# Altium PCB keyInput.PcbDoc
Units mm, origin at the board's own origin, x right, y up, seen from the top; angles counter-clockwise.
Board outline 85 x 80 mm, 2 copper layers (Top Layer, Bottom Layer); 26 components, 32 nets, 92 pads, 0 vias.
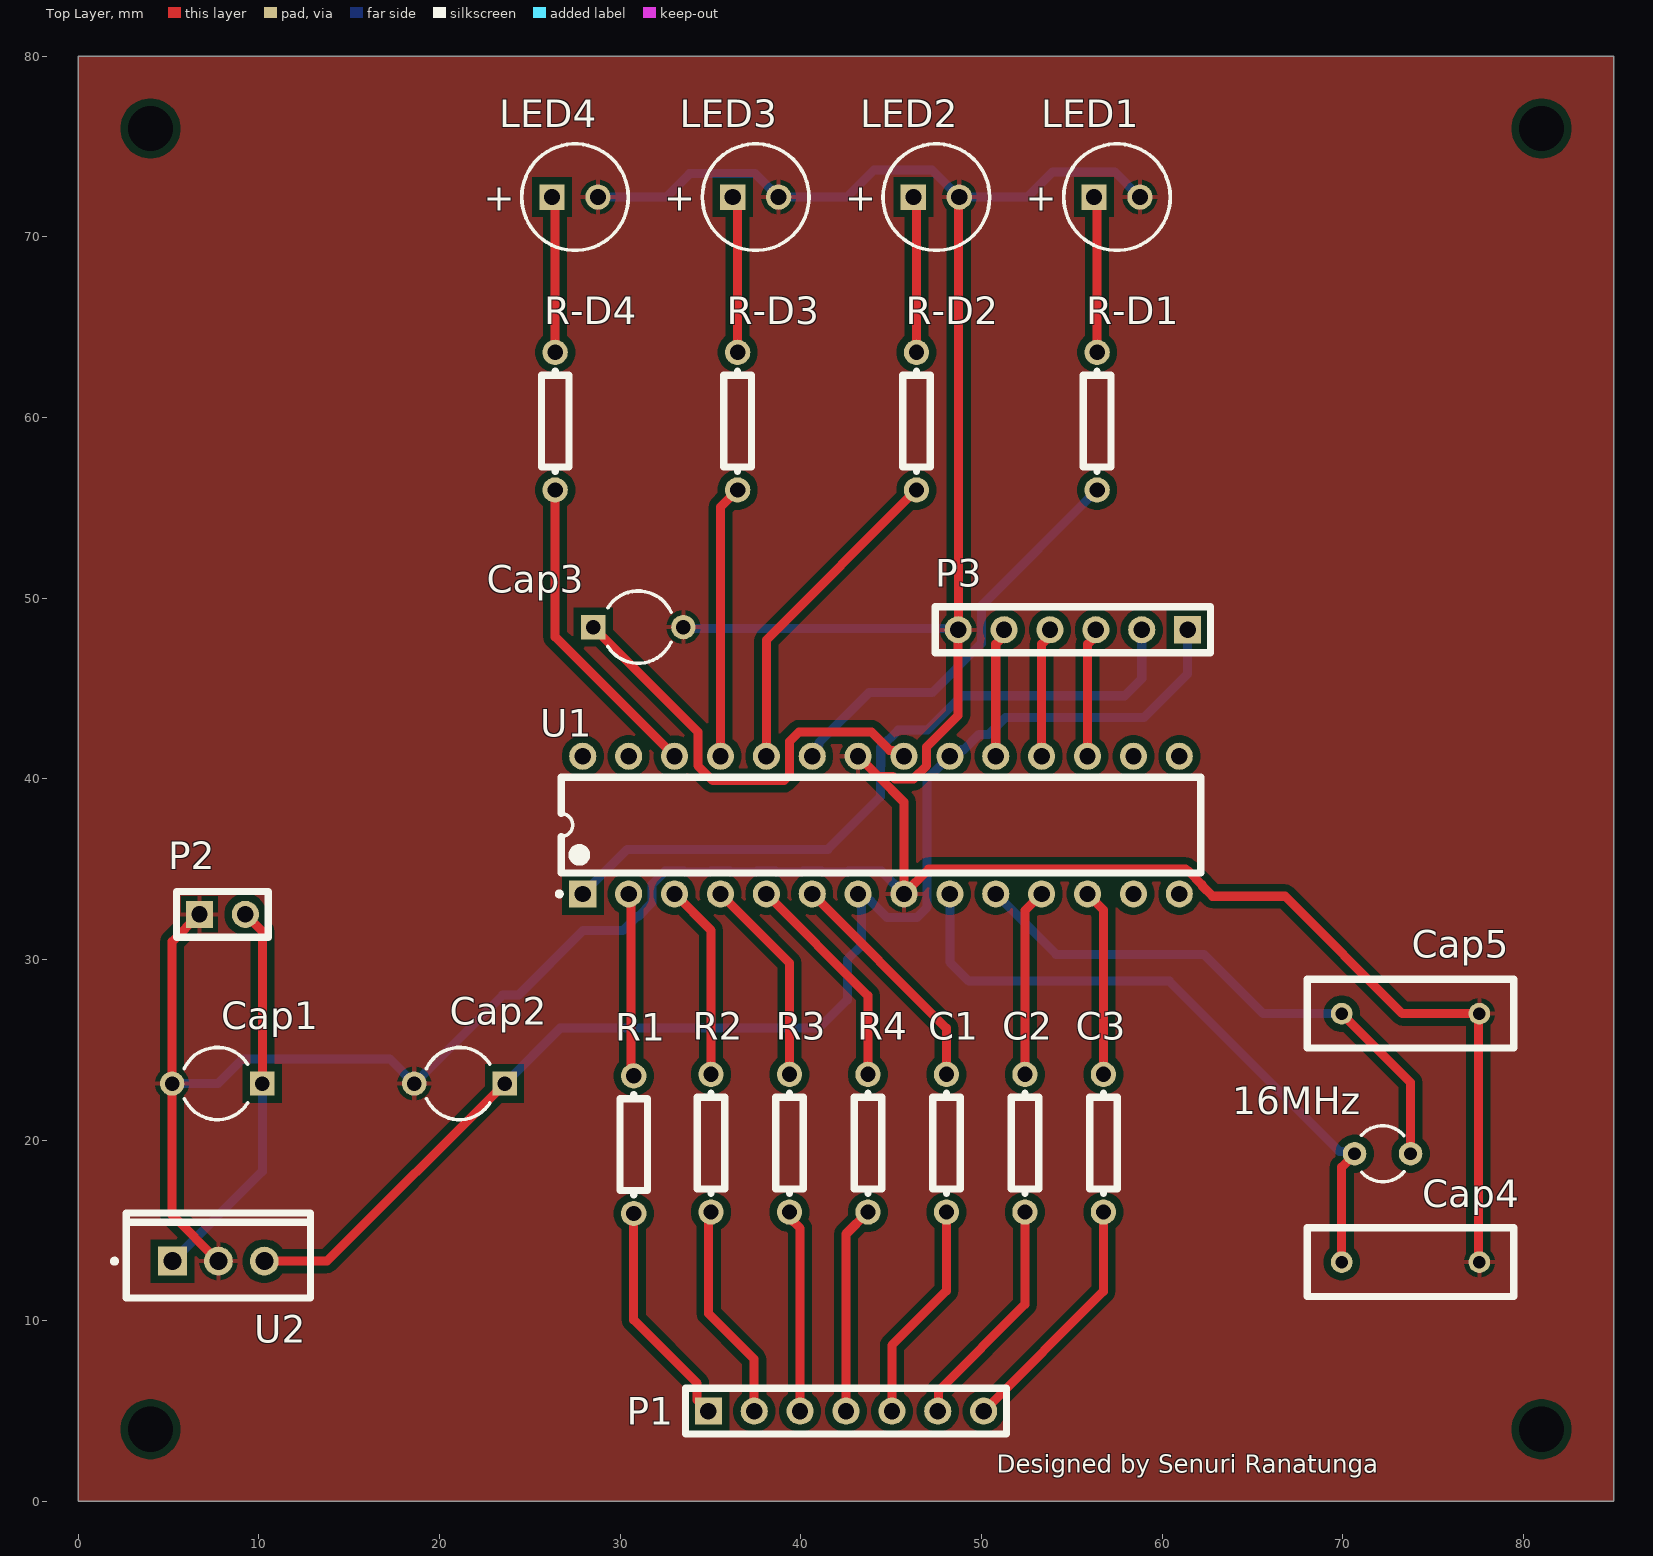
[diagram p0: Top Layer view]
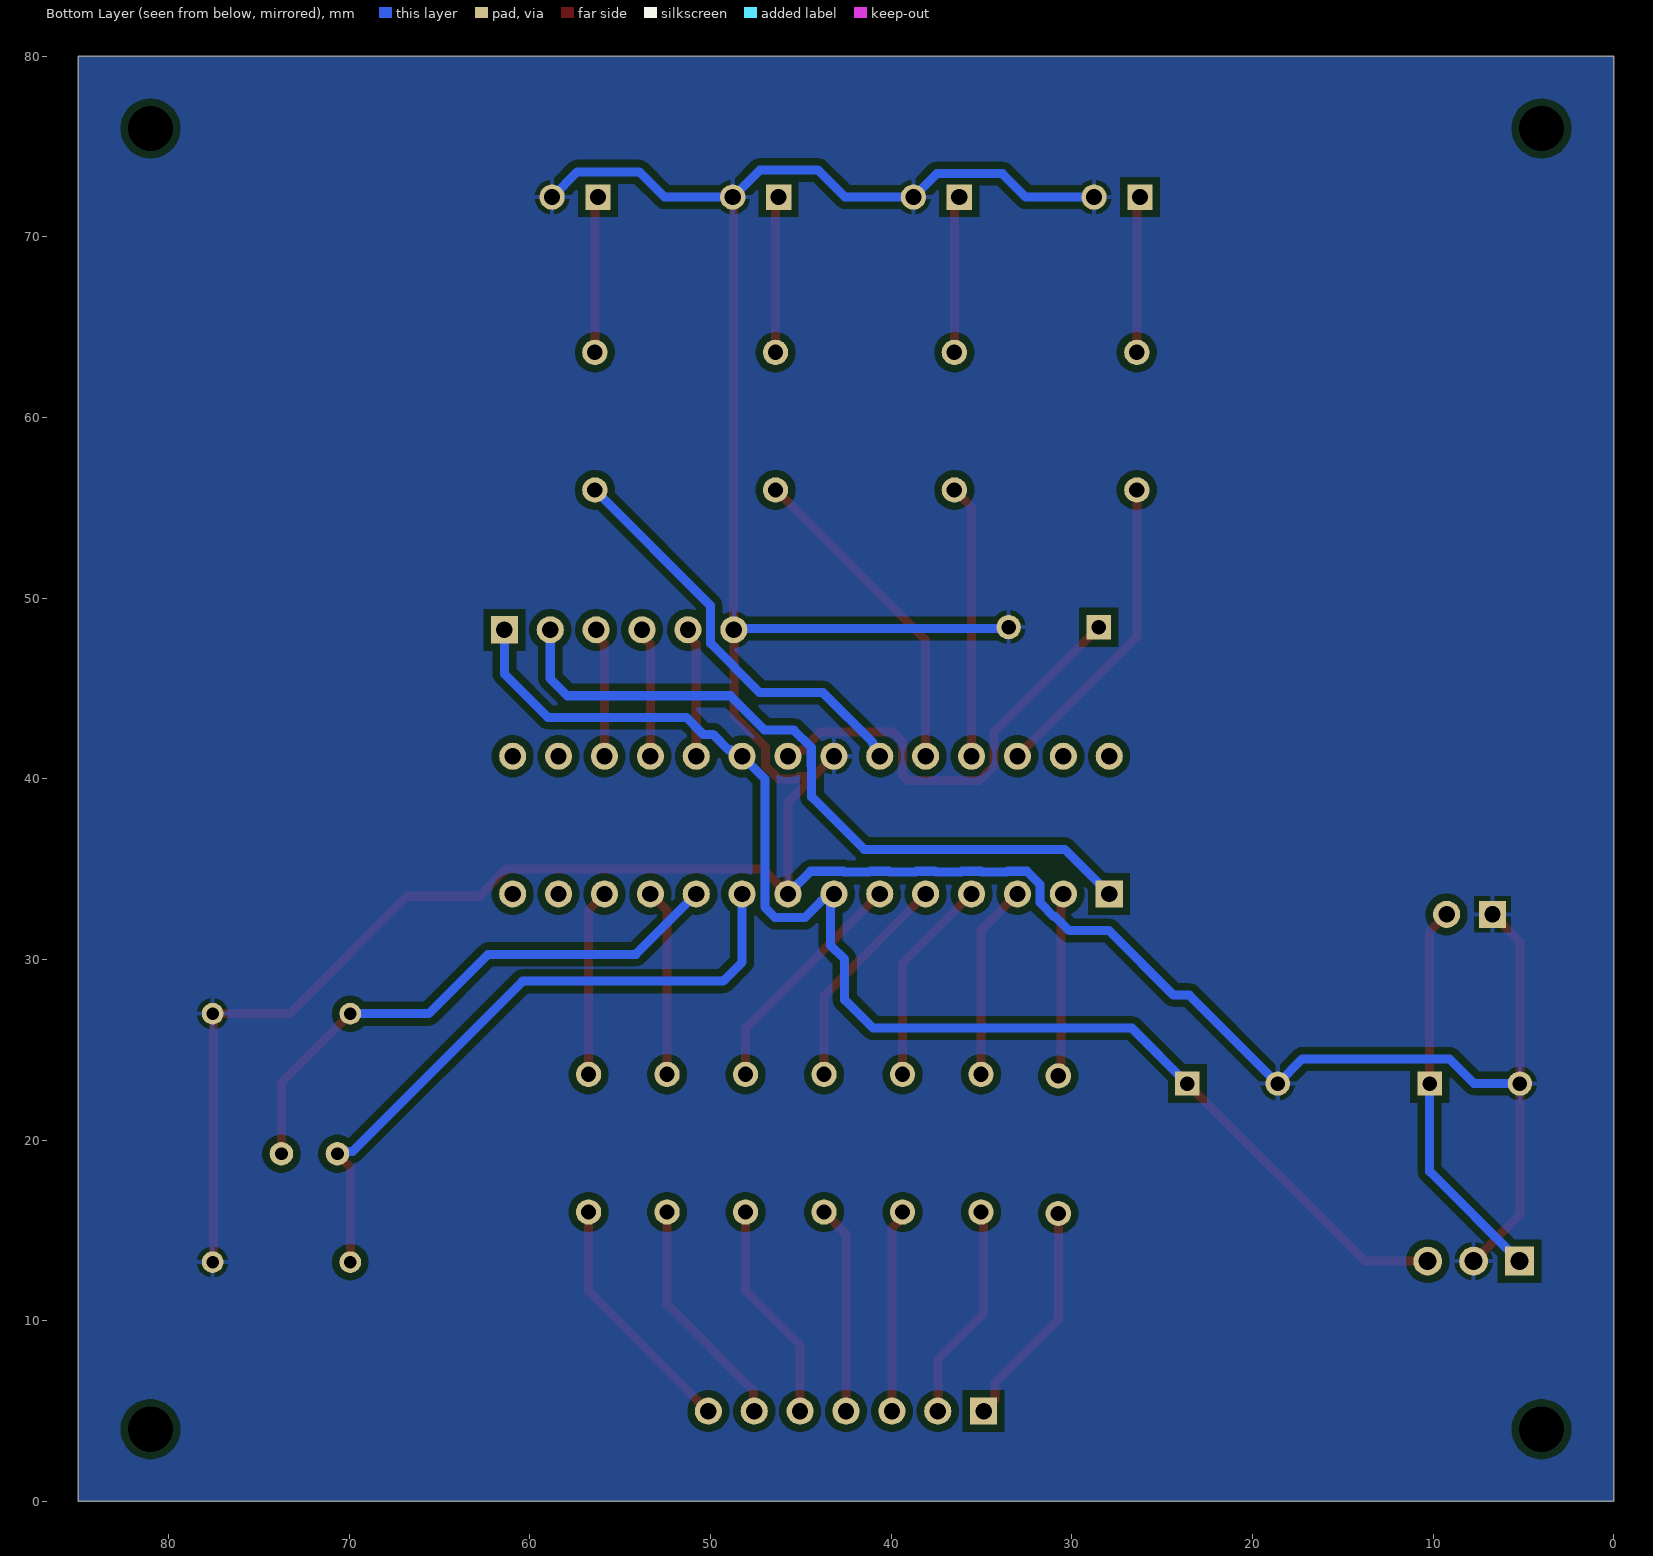
[diagram p1: Bottom Layer view, seen from below]

## Layer stack, top to bottom
Top Solder: solder mask 0.0102, Solder Resist, Dk 3.5
Top Layer: signal copper 0.0356
Dielectric 1: dielectric 0.32, FR-4, Dk 4.8
Bottom Layer: signal copper 0.0356
Bottom Solder: solder mask 0.0102, Solder Resist, Dk 3.5

## Board outline
0,0 0,80 85,80 85,0

## Design rules (kind name [scope] priority, off if disabled: settings)
Clearance [All] p1: gap=0.254 ignorepadtopadclearanceinfootprint=FALSE except(0.4: Arc-Fill Arc-Poly Arc-Region Track-Fill Track-Poly Track-Region SMDPad-Fill SMDPad-Poly SMDPad-Region THPad-Fill THPad-Poly THPad-Region Via-Fill Via-Poly Via-Region Fill-Fill Fill-Poly Fill-Region Poly-Poly Poly-Region Region-Region; 0.6: Arc-Arc Arc-Track Track-Track)
PolygonConnect [All] p1: connectstyle=Relief reliefconductorwidth=0.254 reliefentries=4 polygonreliefangle="90 Angle" airgapwidth=0.254
RoutingVias [All] p1: holewidth=0.711 width=1.27 viastyle="Through Hole" minholewidth=0.711 minwidth=1.27 maxholewidth=0.711 maxwidth=1.27
SilkToSolderMaskClearance [IsPad] p1: minsilkscreentomaskgap=0.127 clearancetoexposedcopper=TRUE
SolderMaskExpansion [All] p1: expansion=0.102 istentingtop=FALSE
Width [All] p1: maxlimit=0.9 minlimit=0.254 preferedwidth=0.6
29 further rules are at their usual default settings.

## Components (designator, comment, footprint, x,y, rotation, side; value= is the part's Value field where it differs from the comment)
16MHz "XTAL" R38 72.2,19.25 r90 top
C1 "470" AXIAL-0.3 48.061,19.831 r270 top
C2 "470" AXIAL-0.3 52.405,19.831 r270 top
C3 "470" AXIAL-0.3 56.75,19.831 r270 top
Cap1 "330nF" CAPR5-4X5 7.695,23.133 r180 top
Cap2 "100nF" CAPR5-4X5 21.101,23.133 r180 top
Cap3 "100nF" CAPR5-4X5 31,48.4 r0 top
Cap4 "22nF" RAD-0.3 73.75,13.25 r0 top
Cap5 "22nF" RAD-0.3 73.75,27 r0 top
LED1 "WP7113SYD" KING-WP7113SYD_V 57.5,72.2 r0 top
LED2 "WP7113SYD" KING-WP7113SYD_V 47.5,72.2 r0 top
LED3 "WP7113SYD" KING-WP7113SYD_V 37.5,72.2 r0 top
LED4 "WP7113SYD" KING-WP7113SYD_V 27.5,72.2 r0 top
P1 "Header 7" HDR1X7 34.88,5 r0 top
P2 "Header 2" HDR1X2 6.71,32.5 r0 top
P3 "Header 6" HDR1X6 61.41,48.25 r180 top
R1 "1K" AXIAL-0.3 30.75,19.75 r90 top
R2 "1K" AXIAL-0.3 35.027,19.831 r270 top
R3 "1K" AXIAL-0.3 39.371,19.831 r270 top
R4 "1K" AXIAL-0.3 43.716,19.831 r90 top
R-D1 "330" AXIAL-0.3 56.4,59.8 r90 top
R-D2 "330" AXIAL-0.3 46.4,59.8 r90 top
R-D3 "330" AXIAL-0.3 36.5,59.8 r90 top
R-D4 "330" AXIAL-0.3 26.4,59.8 r90 top
U1 "ATmega328P-PU" 28P3 44.44,37.44 r90 top
U2 "LM7805CT" FAIR-TO-220-3 7.76,13.3 r90 top

## Footprints (in the part's own frame and the unit in brackets; to place one, negate y for a bottom-side part, rotate by r counter-clockwise, add the part's x,y. Pads: shape width x height; smd on the part's side, far side on the other; paste and mask are expansions set on the pad)
28P3 [mm] "28-Pin Plastic Dual In-Line Package (PDIP)"
  rect 1.5x1.5 hole 0.9: 1(-3.81,16.51)
  round 1.5 hole 0.9: 2(-3.81,13.97) 3(-3.81,11.43) 4(-3.81,8.89) 5(-3.81,6.35) 6(-3.81,3.81) 7(-3.81,1.27) 8(-3.81,-1.27) 9(-3.81,-3.81) 10(-3.81,-6.35) 11(-3.81,-8.89) 12(-3.81,-11.43) 13(-3.81,-13.97) 14(-3.81,-16.51) 15(3.81,-16.51) 16(3.81,-13.97) 17(3.81,-11.43) 18(3.81,-8.89) 19(3.81,-6.35) 20(3.81,-3.81) 21(3.81,-1.27) 22(3.81,1.27) 23(3.81,3.81) 24(3.81,6.35) 25(3.81,8.89) 26(3.81,11.43) 27(3.81,13.97) 28(3.81,16.51)
  silkscreen extent -3.93,-17.7 2.65,17.93, body extent -3.6,-17.65 3.6,17.65, height 4.58
AXIAL-0.3 [mm] "Axial Device, Thru-Hole; 2 Leads; 0.3 in Pin Spacing"
  round 1.4 hole 0.85: 1(-3.81,0) 2(3.81,0)
  silkscreen extent -2.77,-0.76 2.77,0.76
CAPR5-4X5 [mm] "Capacitor; 2 Leads"
  rect 1.35x1.35 hole 0.8: 1(-2.5,0)
  round 1.35 hole 0.8: 2(2.5,0)
  silkscreen extent -1.69,-2 1.82,2
FAIR-TO-220-3 [mm] "FM, 3-Leads, Body 10.2x4.7mm, Pitch 2.54mm"
  rect 1.6x1.6 hole 1: 1(0,2.54)
  round 1.6 hole 1: 2(0,0) 3(0,-2.54)
  silkscreen extent -2.04,-5.1 2.66,5.87, body extent -2.04,-5.1 2.66,5.1, height 18.95
HDR1X2 [mm] "Connector; Header; 2 Position"
  rect 1.5x1.5 hole 0.9: 1(0,0)
  round 1.5 hole 0.9: 2(2.54,0)
  silkscreen extent -1.27,-1.27 3.81,1.27
HDR1X6 [mm] "Connector; Header; 6 Position"
  rect 1.5x1.5 hole 0.9: 1(0,0)
  round 1.5 hole 0.9: 2(2.54,0) 3(5.08,0) 4(7.62,0) 5(10.16,0) 6(12.7,0)
  silkscreen extent -1.27,-1.27 13.97,1.27
HDR1X7 [mm] "Connector; Header; 7 Position"
  rect 1.5x1.5 hole 0.9: 1(0,0)
  round 1.5 hole 0.9: 2(2.54,0) 3(5.08,0) 4(7.62,0) 5(10.16,0) 6(12.7,0) 7(15.24,0)
  silkscreen extent -1.27,-1.27 16.51,1.27
KING-WP7113SYD_V [mm] "THD, 2-Leads, Dia 5.9mm, Body Length 8.6mm"
  rect 1.4x1.4 hole 0.889: 1(-1.27,0)
  round 1.4 hole 0.889: 2(1.27,0)
  silkscreen extent -2.95,-2.95 2.95,2.95, body extent -2.95,-2.95 2.5,2.95, height 15.5
R38 [mm] "Crystal, Thru-Hole; 2 Leads; Body 3.1 x 8.2 mm (Dia.xH)"
  round 1.3 hole 0.7: 1(0,1.55) 2(0,-1.55)
  silkscreen extent -1.55,-1.19 1.55,1.17
RAD-0.3 [mm] "Radial Cap, Thru-Hole; 2 Leads; 0.3 in Pin Spacing"
  round 1.2 hole 0.7: 1(-3.81,0) 2(3.81,0)
  silkscreen extent -5.71,-1.9 5.72,1.91

## Part data
16MHz: "Crystal Oscillator", LatestRevisionDate=17-Jul-2002, LatestRevisionNote="Re-released for DXP Platform.", PackageDescription="Crystal, Thru-Hole; 2 Leads; Body 3.1 x 8.2 mm (Dia.xH)", PackageReference=R38, Published=8-Jun-2000, Publisher="Altium Limited"
C1 C2 C3 R1 R2 R3 R4 R-D1 R-D2 R-D3 R-D4: library part Res1, "Resistor", LatestRevisionDate=17-Jul-2002, LatestRevisionNote="Re-released for DXP Platform.", PackageDescription="Axial Device, Thru-Hole; 2 Leads; 0.3 in Pin Spacing", PackageReference=AXIAL-0.3, Published=8-Jun-2000, Publisher="Altium Limited"
Cap1 Cap2 Cap3: library part Cap2, "Capacitor", PackageDescription="Capacitor; 2 Leads", PackageReference=CAPR5-4X5, Published=23-Sep-2002, Publisher="Altium Limited"
Cap4 Cap5: library part Cap, "Capacitor", LatestRevisionDate=17-Jul-2002, LatestRevisionNote="Re-released for DXP Platform.", PackageDescription="Radial Cap, Thru-Hole; 2 Leads; 0.3 in Pin Spacing", PackageReference=RAD-0.3, Published=8-Jun-2000, Publisher="Altium Limited"
LED1 LED2 LED3 LED4: library part CMP-1757-00003-1, "The Super Bright Yellow Device, 2 V, -40 to 85 degC, 2-Pin THD, RoHS, Tape and Reel", Case\Package=Axial, Max Operating Temperature="155 degC", Min Operating Temperature="-55 degC", Package Quantity=200, Power Rating="250 mW", Resistance="22.1 kohm", Tolerance=1%, Voltage Rating="250 V", ComponentLink1Description=Datasheet, ComponentLink1URL=http://www.kingbrightusa.com/images/catalog/SPEC/WP7113SYD.pdf, DatasheetVersion="Rev. 7B, 01/2015", Length="0.248 inch", Mount="Through Hole", PackageDescription="2-Pin Through Hole Device, Dia 5.9 mm, Body Length 8.6 mm", PackageReference=WP7113SYD, Packaging=Bulk, RoHSCompliant=true
P1: "Header, 7-Pin", LatestRevisionDate=17-Jul-2002, LatestRevisionNote="Re-released for DXP Platform.", Publisher="Altium Limited"
P2: "Header, 2-Pin", LatestRevisionDate=17-Jul-2002, LatestRevisionNote="Re-released for DXP Platform.", Publisher="Altium Limited"
P3: "Header, 6-Pin", LatestRevisionDate=17-Jul-2002, LatestRevisionNote="Re-released for DXP Platform.", Publisher="Altium Limited"
U1: library part CMP-0095-00013-2, "8-bit AVR Microcontroller, 32KB Flash, 1KB EEPROM, 2KB SRAM, 28-pin PDIP, Industrial Grade (-40°C to 85°C)", ComponentLink1Description="Manufacturer URL", ComponentLink1URL=http://www.atmel.com/, ComponentLink2Description="ATmega48A/48PA/88A/88PA/168A/168PA/328/328P Datasheet", ComponentLink2URL=http://www.atmel.com/dyn/resources/prod_documents/8271.pdf, ComponentLink3Description="ATmega48A/48PA/88A/88PA/168A/168PA/328/328P Summary", ComponentLink3URL=http://www.atmel.com/dyn/resources/prod_documents/8271S.pdf, DatasheetVersion="revD, May-2011", PackageDescription="28-lead (0.300\"/7.62mm Wide) Plastic Dual Inline Package (PDIP)", PackageReference=28P3, PackageVersion="revB, Sep-2001", RevisionNote="DatasheetVersion updated. URLs added."
U2: library part CMP-2000-04938-1, "Positive Voltage Regulator, 5 V, 1 A, -40 to 125 degC, 3-Pin TO-220, RoHS, Tube", Manufacturer=FairchildSemiconductor, Maximum Input Voltage=35V, Maximum Output Current=2.2(Typ)A, Maximum Quiescent Current=8mA, Operating Temperature=-40to125degC, Output Voltage=5V, Package=3TO-220AB, Package Description="3-Pin Through Hole Device, Body 10 x 4.5 mm, Pitch 2.54 mm", Package Reference=TO-220, Typical Dropout Voltage @ Current=2@1AV, Accuracy=±4%, Category=LinearRegulator, Datasheet URL=https://datasheet.ciiva.com/26904/lm7805ct-26904988.pdf, Datasheet Version=Aug-12, Line Regulation=100mV, Load Regulation=100mV, Manufacturer URL=https://www.fairchildsemi.com/, Mounting=ThroughHole, Number of Outputs=1, Output Type=Fixed, Package URL=https://www.fairchildsemi.com/package-drawings/TO/TO220B03.pdf, Packaging=Rail/Tube, Polarity=Positive, Rad Hard=No, Type=Linear

## Free pads (board coordinates)
  round 2 hole 2.5 unplated: 1(81,76) 2(81,4) 3(4,4) 4(4,76)

## Nets (pads, with @x,y where several pads share a name; then routed paths per layer and width w, separated by ;. In a path a pad name is that pad's centre, name@x,y a point inside that pad or via, vN(x,y) a via of type N, cw(c..) or ccw(c..) an arc to the next point about the centre after c; other vN are vias at no path point)
GND: Cap1.2 Cap2.2 Cap3.2 Cap4.2 Cap5.2 LED1.2 LED2.2 LED3.2 LED4.2 P2.1 P3.6 U1.8 U1.22 U2.2 | length 210.9
  Top Layer w0.5: P2.1 5.195,30.985 Cap1.2 5.195,15.865 U2.2 ; U1.22 44.301,40.119 ; LED2.2 48.74,72.17 48.74,48.28 P3.6 48.71,43.51 46.964,41.764 46.964,40.731 46.229,39.996 45.211,39.996 45.088,40.119 44.301,40.119 ; Cap4.2 77.5,13.31 77.5,26.94 Cap5.2 73.302,27 66.802,33.5 62.8,33.5 62.204,34.096 62.204,34.149 61.469,34.884 61.416,34.884 61.3,35 47.08,35 U1.8 45.71,38.71 44.301,40.119
  Bottom Layer w0.5: Cap1.2 7.732,23.133 9.099,24.5 17.234,24.5 Cap2.2 23.5,28.032 24.371,28.032 27.939,31.6 30.143,31.6 30.919,32.376 30.989,32.376 31.756,33.143 31.756,34.149 32.491,34.884 33.529,34.884 33.579,34.834 34.981,34.834 35.031,34.884 36.069,34.884 36.119,34.834 37.521,34.834 37.571,34.884 38.609,34.884 38.659,34.834 40.061,34.834 40.111,34.884 41.149,34.884 41.199,34.834 42.601,34.834 42.651,34.884 44.456,34.884 U1.8 ; LED4.2 32.543,72.2 33.843,73.5 37.47,73.5 LED3.2 42.543,72.2 44.044,73.7 47.27,73.7 LED2.2 52.543,72.2 53.944,73.6 57.37,73.6 LED1.2 ; Cap3.2 33.575,48.325 48.635,48.325 P3.6
LED1: R-D1.1 U1.23 | length 23.3
  Bottom Layer w0.5: U1.23 40.63,41.548 40.995,41.912 40.995,41.995 43.774,44.774 47.274,44.774 49.996,47.496 49.996,48.769 50,48.773 50,49.59 R-D1.1
LED2: R-D2.1 U1.24 | length 18.2
  Top Layer w0.5: U1.24 38.09,47.68 R-D2.1
LED3: R-D3.1 U1.25 | length 15.1
  Top Layer w0.5: U1.25 35.55,55.04 R-D3.1
LED4: R-D4.1 U1.26 | length 17.5
  Top Layer w0.5: R-D4.1 26.4,47.86 U1.26
MISO: P3.4 U1.18 | length 7.2
  Top Layer w0.5: U1.18 53.33,47.453 53.79,47.913 P3.4
MOSI: P3.3 U1.17 | length 7.2
  Top Layer w0.5: U1.17 55.87,47.453 56.33,47.913 P3.3
NetC1_2: C1.2 P1.5 | length 12.3
  Top Layer w0.5: P1.5 45.04,8.64 48.061,11.661 C1.2
NetC2_2: C2.2 P1.6 | length 13
  Top Layer w0.5: P1.6 47.631,5.051 47.631,6.131 52.405,10.905 C2.2
NetC3_2: C3.2 P1.7 | length 13.8
  Top Layer w0.5: P1.7 56.75,11.63 C3.2
NetCap3_1: Cap3.1 U1.21 | length 24.6
  Top Layer w0.5: Cap3.1 34.3,42.6 34.3,41.773 34.296,41.769 34.296,40.731 35.127,39.9 39.067,39.9 39.36,40.193 39.36,42.06 39.9,42.6 43.9,42.6 44.919,41.581 45.109,41.581 45.439,41.25 U1.21
NetLED1_1: LED1.1 R-D1.2 | length 8.7
  Top Layer w0.5: LED1.1 56.4,72.03 R-D1.2
NetLED2_1: LED2.1 R-D2.2 | length 8.7
  Top Layer w0.5: LED2.1 46.4,72.03 R-D2.2
NetLED3_1: LED3.1 R-D3.2 | length 8.7
  Top Layer w0.5: LED3.1 36.5,71.93 R-D3.2
NetLED4_1: LED4.1 R-D4.2 | length 8.7
  Top Layer w0.5: LED4.1 26.4,72.03 R-D4.2
NetP1_1: P1.1 R1.1 | length 12.7
  Top Layer w0.5: R1.1 30.75,10.05 34.257,6.543 34.257,5.623 P1.1
NetP1_2: P1.2 R2.2 | length 12.1
  Top Layer w0.5: R2.2 34.9,15.894 34.9,10.4 37.42,7.88 P1.2
NetP1_3: P1.3 R3.2 | length 11.3
  Top Layer w0.5: R3.2 39.371,15.711 39.96,15.122 P1.3
NetP1_4: P1.4 R4.1 | length 11.5
  Top Layer w0.5: P1.4 42.5,14.805 R4.1
Pin1: R1.2 U1.2 | length 10.2
  Top Layer w0.5: U1.2 30.61,33.49 30.61,23.7 R1.2
Pin2: R2.1 U1.3 | length 10.8
  Top Layer w0.5: U1.3 35.027,31.613 R2.1
Pin3: R3.1 U1.4 | length 11.6
  Top Layer w0.5: U1.4 39.371,29.809 R3.1
Pin4: R4.2 U1.5 | length 12.3
  Top Layer w0.5: U1.5 43.716,28.004 R4.2
Pin5: C1.1 U1.6 | length 13.1
  Top Layer w0.5: U1.6 48.061,26.199 C1.1
Pin6: C2.1 U1.11 | length 10.4
  Top Layer w0.5: C2.1 52.405,32.705 U1.11
Pin7: C3.1 U1.12 | length 10.4
  Top Layer w0.5: U1.12 56.75,32.75 C3.1
RESET: P3.2 U1.1 | length 40.2
  Bottom Layer w0.5: U1.1 30.4,36.1 41.501,36.1 44.4,38.999 44.4,40.707 44.424,40.731 44.424,41.737 45.387,42.7 47,42.7 48.9,44.6 57.921,44.6 58.87,45.549 P3.2
SCK: P3.5 U1.19 | length 7.2
  Top Layer w0.5: U1.19 50.79,47.453 51.25,47.913 P3.5
"VCC 5V": Cap2.1 P3.1 U1.7 U1.20 U2.3 | length 75.2
  Top Layer w0.5: U2.3 13.768,13.3 Cap2.1
  Bottom Layer w0.5: Cap2.1 26.668,26.2 41,26.2 42.572,27.772 42.572,30.007 43.36,30.795 U1.7@43.36,33.44 ; U1.7 U1.7@43.36,33.44 ; P3.1 61.41,45.81 59,43.4 51.341,43.4 50.395,42.454 49.854,42.454 49.011,41.611 48.881,41.611 48.711,41.44 48.44,41.44 46.996,39.996 46.996,32.896 46.42,32.32 44.78,32.32 43.875,33.225 43.872,33.225 43.658,33.44 U1.7@43.36,33.44
"VCC 9V": Cap1.1 P2.2 U2.1 | length 21.7
  Top Layer w0.5: P2.2 10.195,31.555 Cap1.1
  Bottom Layer w0.5: U2.1 10.195,18.275 Cap1.1
XTAL1: 16MHz.1 Cap4.1 U1.9 | length 36.9
  Top Layer w0.5: Cap4.1 69.94,18.502 70.65,19.212 16MHz.1
  Bottom Layer w0.5: U1.9 48.25,29.85 49.3,28.8 60.4,28.8 69.816,19.384 70.516,19.384 16MHz.1
XTAL2: 16MHz.2 Cap5.1 U1.10 | length 31.2
  Top Layer w0.5: Cap5.1 73.75,23.19 16MHz.2
  Bottom Layer w0.5: U1.10 54.134,30.286 62.314,30.286 65.6,27 Cap5.1
pads on no net: U1.13 U1.14 U1.15 U1.16 U1.27 U1.28

## Polygon pours and split planes (outlines as drawn)
GND on Top Layer "GND_L01_P000" (solid, pour order 0): 0,0 85,0 85,80 0,80
GND on Bottom Layer "GND_L02_P001" (solid, pour order 1): 0,80 0,0 85,0 85,80

## Silkscreen, mask and mechanical layers (free items; w line width, h text height)
Top Overlay:
  text "Designed by Senuri Ranatunga" at 50.854,1.587 h1
Board Outline:
  the board outline again, w0.4

## Text inside footprints (layer, text, board x,y; h text height)
LED1: Top Overlay "+" at 52.45,71.438 h1.5
LED2: Top Overlay "+" at 42.45,71.45 h1.5
LED3: Top Overlay "+" at 32.45,71.45 h1.5
LED4: Top Overlay "+" at 22.45,71.45 h1.5